# Altium PCB Balance_car.PcbDoc
Units mil, origin at the board's own origin, x right, y up, seen from the top; angles counter-clockwise.
Board outline 3150 x 1220 mil, 2 copper layers (Top Layer, Bottom Layer); 49 components, 28 nets, 188 pads, 34 vias.
Unrouted connection lines stored in the file: 37.
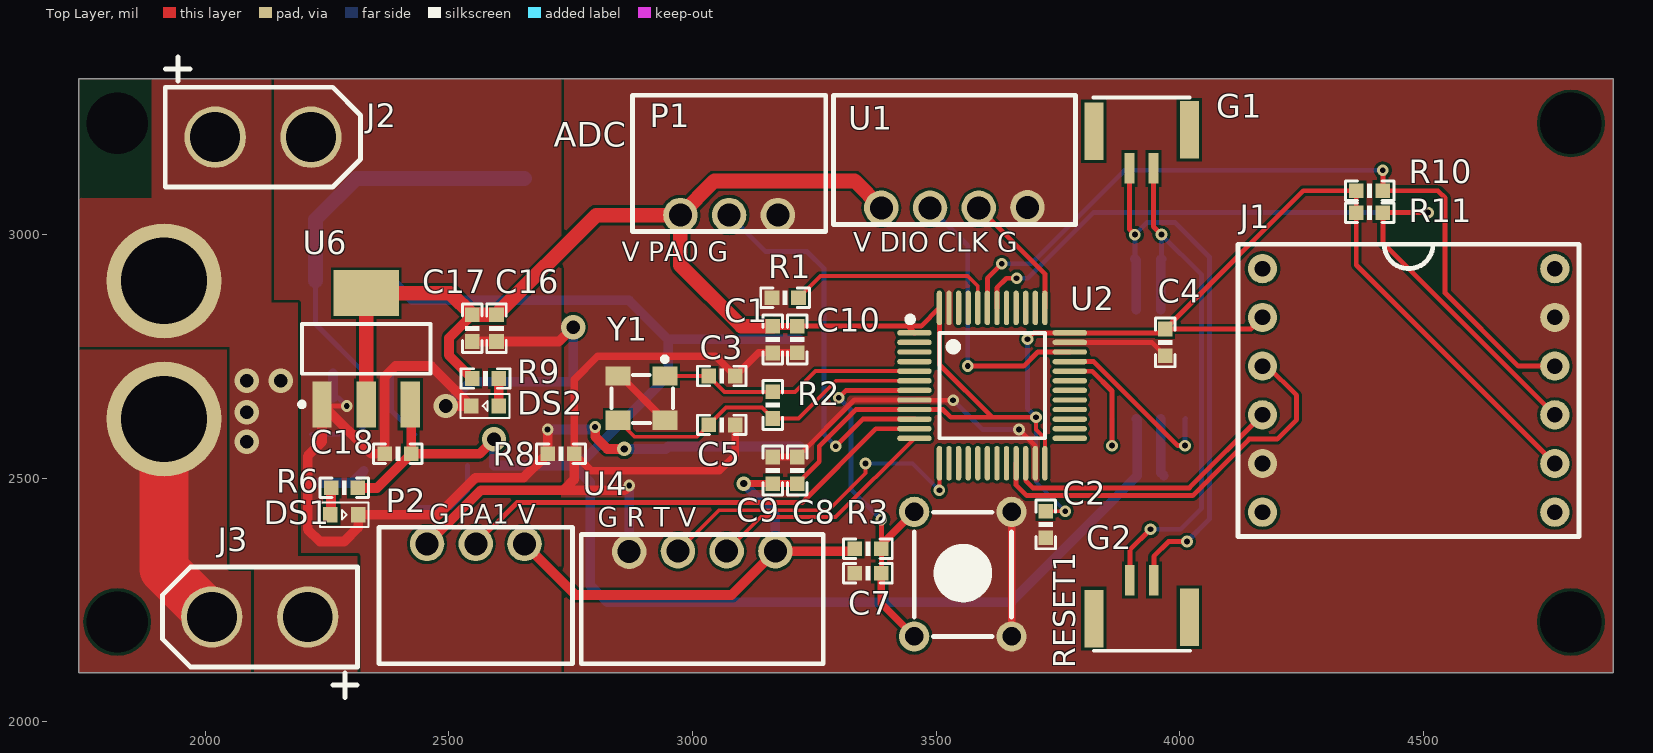
[diagram p0: Top Layer view]
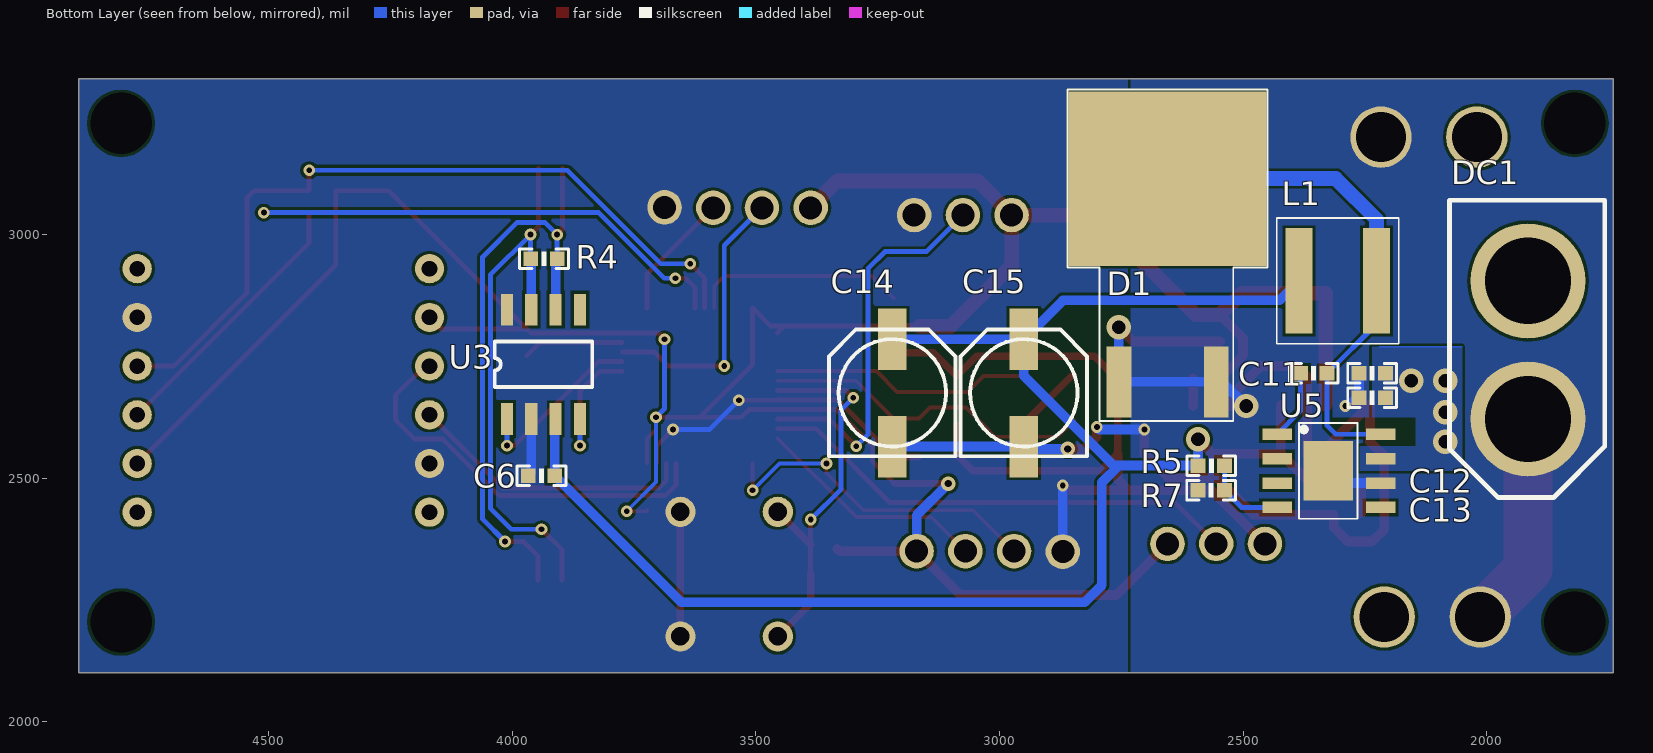
[diagram p1: Bottom Layer view, seen from below]

## Layer stack, top to bottom
Top Solder: solder mask 0.4, Solder Resist, Dk 3.5
Top Layer: signal copper 1.4
Dielectric 1: dielectric 12.6, FR-4, Dk 4.8
Bottom Layer: signal copper 1.4
Bottom Solder: solder mask 0.4, Solder Resist, Dk 3.5

## Board outline
1740,2100 4890,2100 4890,3320 1740,3320

## Design rules (kind name [scope] priority, off if disabled: settings)
Clearance [All] p1: gap=6 ignorepadtopadclearanceinfootprint=FALSE
PolygonConnect [All] p1: connectstyle=Direct reliefconductorwidth=10 reliefentries=4 polygonreliefangle="90 Angle" airgapwidth=10
RoutingVias [All] p1: holewidth=28 width=50 viastyle="Through Hole" minholewidth=28 minwidth=50 maxholewidth=28 maxwidth=50
SolderMaskExpansion [All] p1: expansion=4
Width pwr-l [InNetClass('PWR_L')] p1: maxlimit=15 minlimit=8 preferedwidth=10
Width g [InNetClass('G')] p2: maxlimit=100 minlimit=8 preferedwidth=10
Width pwr [InNetClass('PWR_H')] p3: maxlimit=20 minlimit=8 preferedwidth=15
Width [All] p4: maxlimit=100 minlimit=8 preferedwidth=10
30 further rules are at their usual default settings.

## Components (designator, comment, footprint, x,y, rotation, side; value= is the part's Value field where it differs from the comment)
C1 "0.1uf" 0603P 3165,2784.45 r270 top
C2 "0.1uf" 0603P 3725,2405 r270 top
C3 "22PF" 0603P 3060,2709.71 r0 top
C4 "0.1uf" 0603P 3970,2778.58 r90 top
C5 "22" 0603P 3060,2609.21 r0 top
C6 "104" 0603P 3940,2505 r0 bottom
C7 "0.1uf" 0603P 3360,2305 r0 top
C8 "1uf" 0603P 3215,2515.79 r90 top
C9 "0.1uf" 0603P 3164.94,2515.79 r90 top
C10 "0.1uf" 0603P 3215,2784.45 r90 top
C11 "10nF" 0603P 2355,2715 r180 bottom
C12 "22uF" 0603P 2235,2715 r180 bottom
C13 "22uF" 0603P 2235,2665 r180 bottom
C14 "220uF" CC6.56.5 3220,2675 r270 bottom
C15 "220uF" CC6.56.5 2950,2675 r270 bottom
C16 "104" 0603P 2597.44,2807.5 r90 top
C17 "104" 0603P 2547.44,2807.5 r90 top
C18 "104" 0603P 2395,2550.06 r0 top
D1 "STPS30M60S" STPS30M60S 2755,2697.68 r270 bottom
DC1 "XT60母头" XT60-ĸͷ 1757.52,3070.32 r0 bottom
DS1 "LED0" LED-0603-hm 2285,2425 r0 top
DS2 "LED1" LED-0603-hm 2573.97,2648.11 r180 top
G1 "CAN-GH1.25" GH1.25_1*2_lishi 3823,3281.06 r0 top
G2 "CAN-GH1.25" GH1.25_1*2_lishi 4021,2145.51 r180 top
J1 "JY901" JY901 4170,2930 r0 top
J2 "XT30" XT30 1935.49,3226.43 r0 top
J3 "XT30" XT30 2294.51,2188.57 r180 top
L1 "XAL6060-103MEB" XAL6060-103MEB 2225.94,2905 r0 bottom
P1 "XH2.54-3P" XH2.54插座-3P 2896.26,2980.94 r0 top
P2 "XH2.54-3P" XH2.54插座-3P 2733.74,2424.06 r180 top
R1 "10K" 0603P 3190,2870 r0 top
R2 "1M" 0603P 3164.94,2650 r270 top
R3 "10K" 0603P 3360,2355 r0 top
R4 "120R" 0603P 3935,2950 r0 bottom
R5 "10K" 0603P 2565,2525.75 r0 bottom
R6 "1K" 0603P 2285,2480 r0 top
R7 "3.24K" 0603P 2565.5,2475 r180 bottom
R8 "0R" 0603P 2730,2550 r180 top
R9 "470R" 0603P 2575,2704.53 r180 top
R10 "4.7K" 0603P 4390,3090 r180 top
R11 "4.7K" 0603P 4390,3045 r180 top
RESET1 "KEY_M" KEY_M 3455,2175 r90 top
U1 "HEADER" XH2.54插座-4P 3308.76,2995.94 r0 top
U2 "STM32F103C8T6" LQFP-48_7x7x05P 3615,2690 r270 top locked
U3 "TJA1050" SOP-8 4011.06,2621.5 r90 bottom
U4 "HEADER" XH2.54插座-4P 3248.74,2409.06 r180 top
U5 "TPS5450DDAR" TPS5450 2430,2590 r270 bottom
U6 "AMS1117-3.3" SOT223 2330,2765.47 r0 top
Y1 "8MHZ-无源" "XTAL3225   无源" 2895,2664.21 r180 top

## Footprints (in the part's own frame and the unit in brackets; to place one, negate y for a bottom-side part, rotate by r counter-clockwise, add the part's x,y. Pads: shape width x height; smd on the part's side, far side on the other; paste and mask are expansions set on the pad)
0603P [mil]
  rect 30x30 smd: 1(-27,0) 2(27.5,-0.06)
  silkscreen extent -50,-20 50,20
CC6.56.5 [mm]
  rect 3.2x1.5 smd: 1(-2.794,0) 2(2.8,0)
  silkscreen extent -3.3,-3.3 3.3,3.3
GH1.25_1*2_lishi [mm]
  rect 0.5x1.6 smd: 1(1.88,-3.683) 2(3.13,-3.683)
  rect 1x3 smd: ""(0.025,-1.753) ""(5.004,-1.676)
  silkscreen extent 0,0 5,0
JY901 [mil]
  round 60 hole 32: 1(0,0) 2(0,-100) 3(0,-200) 4(0,-300) 5(0,-400) 6(0,-500) 7(600,0) 8(600,-100) 9(600,-200) 10(600,-300) 11(600,-400) 12(600,-500)
  silkscreen extent -50,-550 650,50
KEY_M [mil]
  round 62 hole 38: 1(0,0) 1(255.91,0) 2(0,-200) 2(255.91,-200)
  silkscreen extent 0,-200 255,0
LED-0603-hm [mm]
  rect 0.75x0.8 smd: 1(-0.725,0) 2(0.725,0)
  silkscreen extent -1.27,-0.64 1.27,0.64
LQFP-48_7x7x05P [mm]
  oval 0.28x1.8 smd mask+0.051: 1(-2.75,-4.05) 2(-2.25,-4.05) 3(-1.75,-4.05) 4(-1.25,-4.05) 5(-0.75,-4.05) 6(-0.25,-4.05) 7(0.25,-4.05) 8(0.75,-4.05) 9(1.25,-4.05) 10(1.75,-4.05) 11(2.25,-4.05) 12(2.75,-4.05) 25(2.75,4.05) 26(2.25,4.05) 27(1.75,4.05) 28(1.25,4.05) 29(0.75,4.05) 30(0.25,4.05) 31(-0.25,4.05) 32(-0.75,4.05) 33(-1.25,4.05) 34(-1.75,4.05) 35(-2.25,4.05) 36(-2.75,4.05)
  oval 1.8x0.28 smd mask+0.051: 13(4.05,-2.75) 14(4.05,-2.25) 15(4.05,-1.75) 16(4.05,-1.25) 17(4.05,-0.75) 18(4.05,-0.25) 19(4.05,0.25) 20(4.05,0.75) 21(4.05,1.25) 22(4.05,1.75) 23(4.05,2.25) 24(4.05,2.75) 37(-4.05,2.75) 38(-4.05,2.25) 39(-4.05,1.75) 40(-4.05,1.25) 41(-4.05,0.75) 42(-4.05,0.25) 43(-4.05,-0.25) 44(-4.05,-0.75) 45(-4.05,-1.25) 46(-4.05,-1.75) 47(-4.05,-2.25) 48(-4.05,-2.75)
  silkscreen extent -3.6,-4.42 2.75,2.75, body extent -4.5,-4.5 4.5,4.5, height 1.45
SOP-8 [mil]
  rect 65x25 smd: 1(0,0) 2(0,-50) 3(0,-100) 4(0,-150) 5(224.41,-150) 6(224.41,-100) 7(224.41,-50) 8(224.41,0)
  silkscreen extent 65,-175 159,25
SOT223 [mm]
  rect 1x2.4 smd: 1(-2.3,-2.9) 2(0,-2.9) 3(2.3,-2.9)
  rect 3.4x2.4 smd: 4(0,2.9)
  silkscreen extent -3.47,-3.02 3.35,1.3, body extent -3.35,-1.85 3.35,1.85, height 1.8
STPS30M60S [mm]
  rect 3.7x1.3 smd: 1(0,0) 1(0,5.08)
  rect 9.1x10.3 smd: 2(-10.6,2.54)
  silkscreen extent -15.24,-2.67 2.03,7.75
TPS5450 [mm]
  rect 0.6x1.55 smd: 1(0,0) 2(1.27,0) 3(2.54,0) 4(3.81,0) 5(3.81,5.4) 6(2.54,5.4) 7(1.27,5.4) 8(0,5.4)
  rect 3.1x2.6 smd: 9(1.905,2.667)
  silkscreen extent -0.59,1.14 4.41,4.18
XAL6060-103MEB [mm]
  rect 1.43x5.5 smd: 1(0,0) 2(4.04,0)
  silkscreen extent -1.16,-3.28 5.2,3.28
XH2.54插座-3P [mm]
  round 1.8 hole 1.2: 1(2,1.5) 2(4.54,1.5) 3(7.08,1.5)
  silkscreen extent -0.5,0.64 9.58,7.75
XH2.54插座-4P [mm]
  round 1.8 hole 1.2: 1(2,1.5) 2(4.54,1.5) 3(7.08,1.5) 4(9.62,1.524)
  silkscreen extent -0.5,0.64 12.12,7.37
XT30 [mm]
  round 3.2 hole 2.6: 0(7.147,-0.671) 1(2.147,-0.671)
  silkscreen extent -0.45,-3.27 9.73,3.52, body extent -0.43,-3.21 9.73,2, height 11.5
XT60-ĸͷ [mm]
  round 6 hole 4.5: 1(4,4.2) 2(4,11.4)
  silkscreen extent 0,0 8.1,15.5
"XTAL3225   无源" [mil]
  rect 51.18x39.37 smd: 1(-48,-45.5) 2(48,-45.5) 3(48,45.5) 4(-48,45.5)
  silkscreen extent -65,-85 61,51

## Part data
C1 C2 C3 C4 C5 C6 C7 C8 C9 C10 C11 C12 C13 C16 C17 C18: library part C
C14 C15: library part CAP
DC1: library part XT60-ĸͷ
DS1 DS2: library part LED2, "Typical RED, GREEN, YELLOW, AMBER GaAs LED", PackageDocument=Feb-2002, LatestRevisionDate=17-Jul-2002, LatestRevisionNote="Re-released for DXP Platform.", PackageReference=3.2X1.6X1.1, Published=8-Jun-2000, Publisher="Altium Limited"
G1 G2: library part GH1.25-CAN
J1: library part JY901-PAD
L1: library part 贴片电感
P1 P2: library part XH2.54插座-3P
R1 R2 R3 R4 R5 R6 R7 R8 R9 R10 R11: library part R
U1 U4: library part XH2.54插座-4P
U3: library part SN65HVD230D
U5: library part TPS5450
U6: library part AMS1117
Y1: library part XTAL-3225

## Free pads (board coordinates)
  round 118.11 hole 125.98: ""(1818.9,2204.72) ""(1818.9,3228.35) ""(4803.15,2204.72) ""(4803.15,3228.35)

## Via types
v1: diameter 24, hole 12, Top Layer to Bottom Layer, 25 vias
v2: diameter 50, hole 28, Top Layer to Bottom Layer, 7 vias
v3: diameter 30, hole 15, Top Layer to Bottom Layer, 2 vias

## Nets (pads, with @x,y where several pads share a name; then routed paths per layer and width w, separated by ;. In a path a pad name is that pad's centre, name@x,y a point inside that pad or via, vN(x,y) a via of type N, cw(c..) or ccw(c..) an arc to the next point about the centre after c; other vN are vias at no path point)
3V3: C1.1 C2.1 C4.2 C8.1 C9.1 C10.2 C16.2 C17.2 J1.2 J1.11 P1.1 P2.1 R3.1 R9.2 R10.2 R11.2 U1.1 U2.1 U2.9 U2.24 U2.36 U2.48 U4.1 U6.2 U6.4 | length 6486.3
  Top Layer w8: v1(3705,2625) 3705,2600 3723.27,2581.73 U2.24 ; C2.1@3723.27,2433.73 C2.1 v1(3765,2432)
  Top Layer w10: C8.1 3260,2533.79 3260,2565.6 3335.19,2640.79 U2.9 3514.21,2640.79 3530,2625 3615,2625 ; C10.2 3441.87,2811.95 ; U2.1 3441.87,2811.95 ; v1(3687.5,2785) 3700.77,2798.27 U2.36 3962.25,2798.27 C4.2 ; v1(3705,2625) 3615,2625 ; J1.2 4146.08,2806.08 C4.2 ; J1.11 4362.5,2937.5 R11.2 R10.2 4254.05,3090.06 C4.2 ; 3441.87,2811.95 3469.23,2811.95 U2.48 3506.73,2733.27 3615,2625
  Top Layer w15: v3(3105,2488.79) C9.1 C8.1 ; C1.1 3214.56,2811.45 C10.2
  Top Layer w20: R9.2 2500,2752.09 2500,2787.5 C17.2 ; P2.1 2760,2260 3080,2260 U4.1 3328,2350 R3.1
  Top Layer w30: U6.2 U6.4 2502.85,2879.65 C17.2 C16.2 2802.5,3040 P1.1 ; C1.1 3100.5,2811.45 2975,2936.95 P1.1 ; U1.1 3332.5,3110 3045,3110 P1.1
  Bottom Layer w8: v1(3705,2625) 3705,2492 v1(3765,2432)
  Bottom Layer w10: v1(3687.5,2785) 3687.5,2642.5 v1(3705,2625)
  Bottom Layer w20: v3(3105,2488.79) 3170,2423.79 U4.1
ADC_PA0: P1.2 U2.10 | length 799.5
  Top Layer w10: v1(3293.86,2565.6) 3349.37,2621.1 U2.10
  Bottom Layer w10: P1.2 3150,2965 3235,2965 3270,2930 3270,2589.46 v1(3293.86,2565.6)
CAN1_H: G1.2 G2.2 R4.2 U3.7 | length 1138.5
  Top Layer w10: G2.2 3897.79,2352.79 v1(3940,2395) ; G1.2 3946.21,3016.29 v1(3962.5,3000)
  Bottom Layer w10: v1(3940,2395) 4002.13,2395 4045,2437.87 4045,2917.5 v1(3962.5,3000) R4.2
  Bottom Layer w20: U3.7 3961.06,2948.63 R4.2
CAN1_L: G1.1 G2.1 R4.1 U3.6 | length 1221.6
  Top Layer w10: G1.1 3897,3010.94 v1(3908,2999.94) ; G2.1 3947,2339.75 3977.25,2370 v1(4015,2370)
  Bottom Layer w10: R4.1 v1(3908,2999.94) 3933.06,3025 3990,3025 4061,2954 4061,2416 v1(4015,2370)
  Bottom Layer w20: R4.1 3911.06,2946.94 U3.6
"CAN RX": U2.32 U3.4 | length 270.5
  Top Layer w10: U2.32 3820.47,2719.53 3861.06,2678.94 v1(3861.06,2566.66)
  Bottom Layer w10: v1(3861.06,2566.66) U3.4
"CAN TX": U2.33 U3.1 | length 364.4
  Top Layer w10: U2.33 3823.41,2739.21 3995.97,2566.66 v1(4011.06,2566.66)
  Bottom Layer w10: v1(4011.06,2566.66) U3.1 ; U3.1@4011.06,2621.94 U3.1@4012.13,2623
E_SCL: J1.10 R11.1 U2.42 | length 1644.5
  Top Layer w10: U2.42 3624.84,2890.63 3644.53,2910.32 v1(3665.32,2910.32) ; v1(4510,3045) R11.1 4417,2983 J1.10
  Bottom Layer w10: v1(3665.32,2910.32) 3687.94,2910.32 3822.63,3045 v1(4510,3045)
E_SDA: J1.9 R10.1 U2.43 | length 1622.9
  Top Layer w10: U2.43 3605.16,2910.32 v1(3634.84,2940) ; v1(4417,3132) R10.1 4530,3090 4545,3075 4545,2880 4695,2730 J1.9
  Bottom Layer w10: v1(3634.84,2940) 3695,2940 3887,3132 v1(4417,3132)
GND: C1.2 C2.2 C3.2 C4.1 C5.2 C6.2 C7.1 C8.2 C9.2 C10.1 J1.5 J1.8 P1.3 P2.3 R1.1 R8.1 RESET1.2 U1.4 U2.8 U2.23 U2.35 U2.47 U3.2 U3.8 U4.4 Y1.2 Y1.4 | length 3148.7
  Top Layer w10: C8.2 3332.25,2660.47 U2.8 3456.02,2660 v1(3535,2660) ; v1(3670,2600) 3703.58,2566.42 U2.23 ; U2.35 3943,2778.58 C4.1
  Top Layer w15: Y1.2 2852,2709.71 Y1.4 ; C5.2 3087.5,2547.5 3055,2515 2792,2515 2762,2545 R8.1 2757,2702 2805,2750 3047.15,2750 C3.2 3135.3,2757.45 C10.1 ; C9.2 C8.2 ; RESET1.2@3655,2175 RESET1.2@3655,2430.91
  Top Layer w20: P2.3 2565,2475 2735,2475 ; R8.1 2757,2497 2735,2475 ; v1(2870,2485) 2860,2475 2735,2475
  Bottom Layer w10: v1(3535,2660) 3595,2600 v1(3670,2600)
  Bottom Layer w20: U4.4 v1(2870,2485) ; U3.2 3961.06,2511.5 C6.2
NetC3_1: C3.1 R2.1 U2.5 Y1.1 | length 543.7
  Top Layer w8: Y1.1 C3.1 3065.71,2677 R2.1 3210,2677 3252.53,2719.53 U2.5
NetC5_1: C5.1 R2.2 U2.6 Y1.3 | length 688.7
  Top Layer w8: Y1.3 2880.71,2585 3008.79,2585 C5.1 3068.79,2645 3142.37,2645 R2.2 3217.5,2622.5 3294.84,2699.84 U2.6
NetC7_2: C7.2 R3.2 RESET1.1 U2.7 | length 811.5
  Top Layer w10: v1(3300,2665) 3315.16,2680.16 U2.7 ; C7.2 R3.2 3387.5,2363.41 v1(3387.5,2415)
  Top Layer w15: C7.2 3387.5,2242.5 RESET1.1@3455,2175 ; R3.2@3387.5,2363.41 RESET1.1@3455,2430.91
  Bottom Layer w10: v1(3300,2665) 3325,2640 3325,2477.5 v1(3387.5,2415)
NetC11_1: C11.1 U5.1 | length 144.9
  Bottom Layer w10: C11.1 2382,2638 U5.1
NetC11_2: C11.2 D1.2 L1.1 U5.8 | length 1046.7
  Bottom Layer w10: U5.8 2310,2590 2327.5,2607.5 C11.2 2225.94,2816.49 L1.1
  Bottom Layer w30: L1.1 2225.94,3030.94 2310,3115 D1.2
NetDS1_1: DS1.1 R6.1 | length 52
  Top Layer w20: DS1.1@2258,2428 R6.1
NetDS2_1: DS2.1 R9.1 | length 56.6
  Top Layer w20: R9.1 2602,2648.62 DS2.1
NetR1_2: R1.2 U2.44 | length 440.2
  Top Layer w8: R1.2 3262.56,2915 3564.96,2915 3585.47,2894.49 U2.44
NetR5_1: R5.1 R7.2 U5.4 | length 173.3
  Bottom Layer w10: U5.4 2503.06,2440 R7.2 R5.1
PA1: P2.2 U2.11 | length 998.5
  Top Layer w10: P2.2 2640,2450 3225,2450 3376.42,2601.42 U2.11
PGND: C12.1 C13.1 C14.2 C15.2 C16.1 C17.1 C18.1 D1.1 DC1.2 DS1.2 DS2.2 J2.0 J3.0 R7.1 R8.2 U5.6 U5.9 U6.1 | length 3376.3
  Top Layer w10: U6.1 2242.64,2648.11 v1(2290,2648.11)
  Top Layer w20: U6.1 2239.45,2574.45 2210,2545 2210,2395 2235,2370 2285,2370 2313.54,2398.54 DS1.2 2478.23,2425 2554.23,2501 2653.44,2501 R8.2 v1(2702.5,2600) ; U6.1@2242.64,2648.11 2340.68,2550.06 C18.1 2368,2708 2390,2730 2463.53,2730 DS2.2 v2(2493.19,2648.11) ; C17.1 C16.1 2725.5,2780.5 v2(2755,2810) ; v1(2800,2605) 2800,2585 2825,2560 v3(2860,2560)
  Top Layer w100: DC1.2 1915,2313.15 J3.0
  Bottom Layer w10: C13.1 2273.11,2665 v1(2290,2648.11)
  Bottom Layer w20: U5.6 2300,2490 U5.9 ; C13.1 C12.1 ; v2(2493.19,2648.11) 2542.76,2697.68 2555,2697.68 2755,2697.68 v2(2755,2810) ; v1(2702.5,2600) 2795,2600 v1(2800,2605) ; v3(2860,2560) 2945.24,2560 C15.2 C14.2
SWCLK: U1.3 U2.37 | length 261.8
  Top Layer w10: U1.3 3723.27,2919.23 U2.37
SWDIO: U1.2 U2.34 | length 578.5
  Top Layer w10: v1(3565,2730) 3680,2730 3708.9,2758.9 U2.34
  Bottom Layer w10: U1.2 3565,2977.5 v1(3565,2730)
U2_RX: U2.13 U4.3 | length 701.3
  Top Layer w8: U4.3 3054,2434 3279,2434 3355,2510 v1(3355,2530) ; v1(3506.73,2475) U2.13
  Bottom Layer w8: v1(3355,2530) 3451.73,2530 v1(3506.73,2475)
U2_TX: U2.12 U4.2 | length 481.5
  Top Layer w8: U4.2 3140,2420 3293.82,2420 U2.12
U3_RX: J1.4 U2.22 | length 590.2
  Top Layer w10: U2.22 3683.9,2494.68 3698.58,2480 4020,2480 J1.4
U3_TX: J1.3 U2.21 | length 839.1
  Top Layer w10: U2.21 3664.21,2485.76 3685.98,2464 4026.63,2464 4142.63,2580 4200,2580 4240,2620 4240,2670 4180,2730 J1.3
VCC5: C6.1 C14.1 C15.1 C18.2 L1.2 R5.2 R6.2 U3.3 U6.3 | length 3494
  Top Layer w20: R6.2 2352.44,2479.94 C18.2 ; U6.3 2422.5,2649.35 C18.2 ; v2(2592.5,2580) 2562.5,2550 C18.2
  Bottom Layer w20: L1.2 2425,2865 2870,2865 C15.1 ; v2(2592.5,2580) R5.2 2755,2525.81 ; C14.1 C15.1 ; U3.3 3913,2619.56 C6.1 3653,2245 2825,2245 2790,2280 2790,2490.81 2755,2525.81 ; 2755,2525.81 2765.81,2525.81 2950,2710 C15.1
VCC_INPUT: C12.2 C13.2 DC1.1 J2.1 J3.1 U5.7
  other v2: 2085,2575 2085,2635 2085,2700 2155,2700
pads on no net: G1. G2. J1.1 J1.6 J1.7 J1.12 U2.2 U2.3 U2.4 U2.14 U2.15 U2.16 U2.17 U2.18 U2.19 U2.20 U2.25 U2.26 U2.27 U2.28 U2.29 U2.30 U2.31 U2.38 U2.39 U2.40 U2.41 U2.45 U2.46 U3.5 U5.2 U5.3 U5.5

## Polygon pours and split planes (outlines as drawn)
GND on Top Layer (solid, remove dead copper, pour order 16): 2730,3320 2730,2100 4890,2100 4890,3320
PGND on Top Layer (solid, remove dead copper, pour order 14): 1740,3320 1740,2100 2730,2100 2730,3320
VCC_INPUT on Top Layer "Top Layer-VCC_INPUT" (solid, remove dead copper, pour order 4): 2050,2860 2190,2860 2190,2340 2312,2340 2312,2100 2100,2100 2100,2315 2050,2315
VCC_INPUT on Top Layer "Top Layer-VCC_INPUT 1" (solid, remove dead copper, pour order 2): 2135,2770 2135,3320 1890,3320 1890,3075 1745,3075 1740,3080 1740,2770
VCC_INPUT on Top Layer "Top Layer-VCC_INPUT 2" (solid, remove dead copper, pour order 0): 2070,2770
GND on Bottom Layer (solid, remove dead copper, pour order 18): 2730,3320 2730,2100 4890,2100 4890,3320
PGND on Bottom Layer (solid, remove dead copper, pour order 12): 1740,3320 1740,2100 2730,2100 2730,3320
VCC_INPUT on Bottom Layer "Bottom Layer-VCC_INPUT" (solid, remove dead copper, pour order 10): 2050,2770 2235,2770 2235,2625 2145,2625 2145,2565 2259.76,2565 2260,2564.76 2260,2515 2050,2515
VCC_INPUT on Bottom Layer "Bottom Layer-VCC_INPUT 1" (solid, remove dead copper, pour order 6): 2050,2770 2220,2770

## Other copper
Bottom Layer:
  pour cut-out: 2241.49,2625 2316.28,2625 2316.28,2612.15 2305.35,2601.22 2253.91,2601.22 2253.91,2607.81 2258.25,2612.15 2247.85,2612.15 2239.59,2620.41
  pour cut-out: 2151.49,2618.51 2151.49,2571.49 2180.2,2571.49 2180.89,2572.19 2180.89,2607.81 2253.91,2607.81 2258.25,2612.15 2247.85,2612.15 2239.59,2620.41

## Silkscreen, mask and mechanical layers (free items; w line width, h text height)
Top Overlay:
  text "ADC" at 2715,3180 h50
  text "V DIO CLK G" at 3330,2965 h39.37
  text "V PA0 G" at 2855,2945 h39.37
  text "G PA1 V" at 2460,2406 h39.37
  text "G R T V" at 2805,2400 h39.37
Mechanical 1:
  the board outline again, w3.94